# Altium PCB PCB-NW0101 Rev.B.PcbDoc (part 3 of 3)
Units mil, origin at the board's own origin, x right, y up, seen from the top; angles counter-clockwise.
Board outline 787.4 x 1377.95 mil, 6 copper layers (Top, GND, Inner3, Inner4, PWR, Bottom), stack 29.136 mil thick; 118 components, 126 nets, 559 pads, 474 vias.
Unrouted connection lines stored in the file: 214.
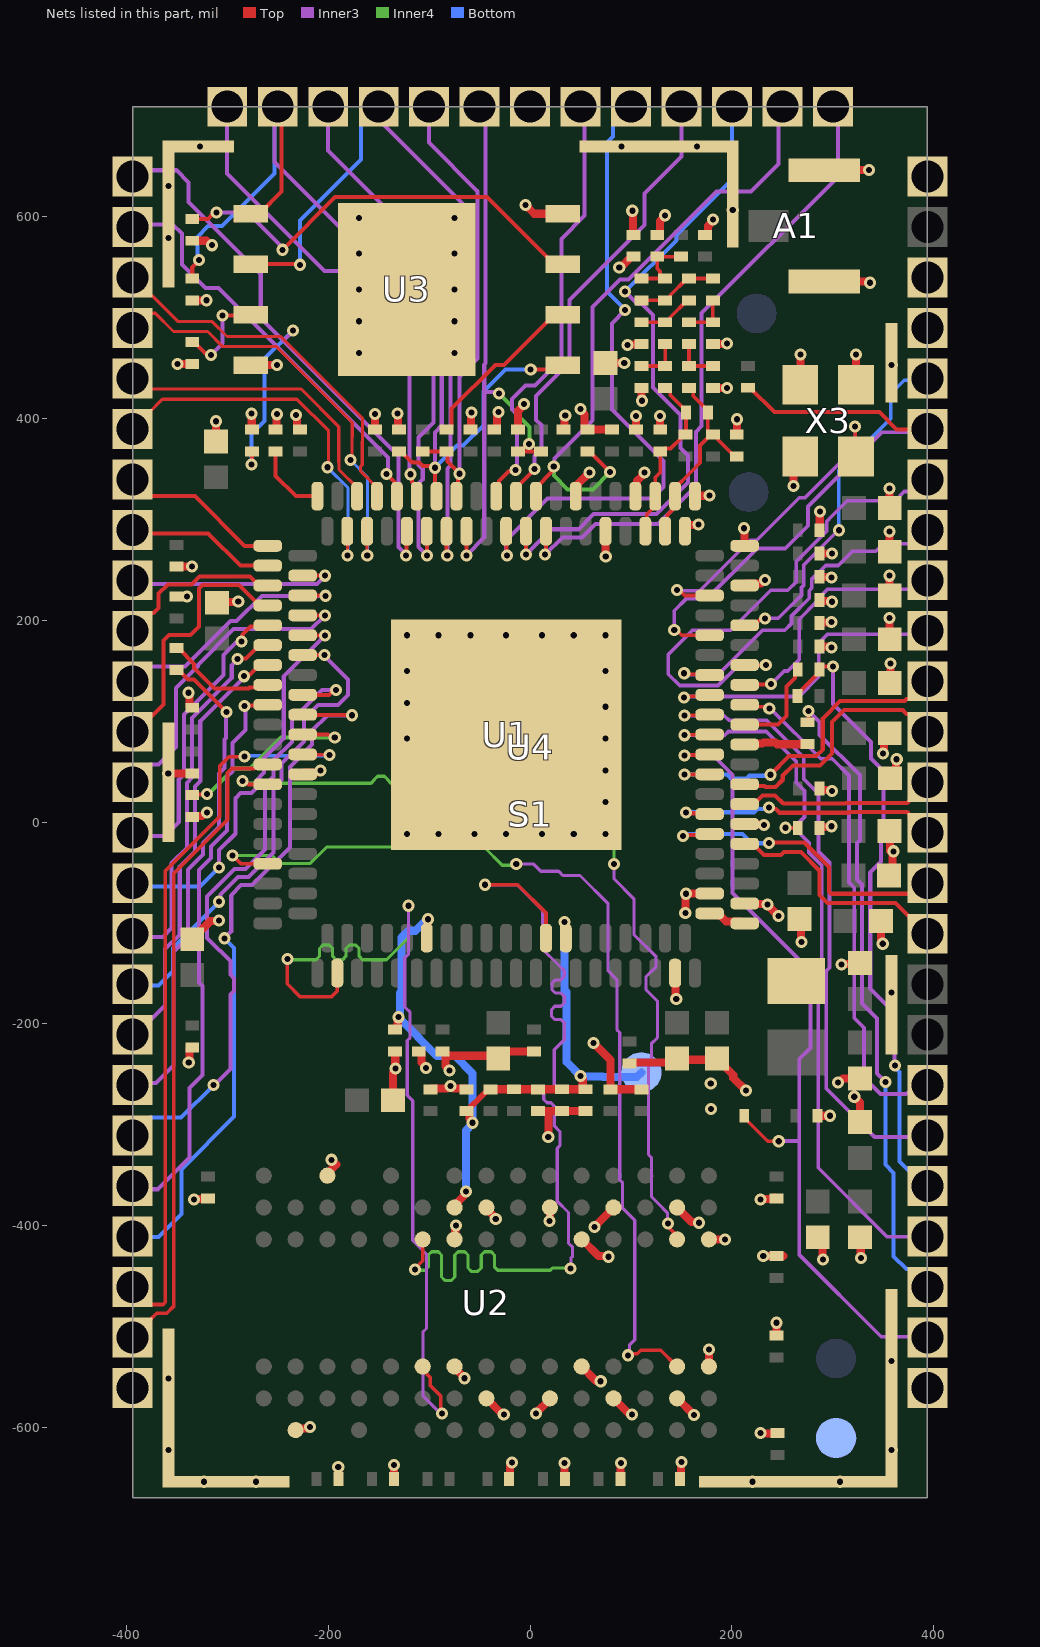
[diagram p7: the nets of this part, all layers, seen from the top]

## Via types
v1: diameter 12/12/12/12 (per signal layer), hole 6, Top to Bottom, tented both sides, 474 vias

## Nets (pads, with @x,y where several pads share a name; then routed paths per layer and width w, separated by ;. In a path a pad name is that pad's centre, name@x,y a point inside that pad or via, vN(x,y) a via of type N, cw(c..) or ccw(c..) an arc to the next point about the centre after c; other vN are vias at no path point) (continued)
DDR_RAS: U1.81 U2.K7 | length 883.6
  Top w3.63: v1(-240.4,-135.79) -240.6,-135.99 -240.6,-160.31 -227.68,-173.23 -196.85,-173.23 -190.95,-167.32 U1.81@-190.95,-149.6 ; U2.K7@-106.3,-539.37 -106.3,-542.72 -98.79,-550.22 -98.79,-558.21 -88.62,-568.38 -88.62,-584.3 v1(-87.09,-585.83)
  Inner3 w3.1: v1(-120.23,-82.96) -120.23,-130.52 -124.15,-134.43 -124.15,-183.19 -118.77,-188.57 -118.77,-213.56 -121.65,-216.45 -121.65,-270.77 -116.22,-276.2 -116.22,-414.59 -102.59,-428.23 -102.59,-501.68 -106.12,-505.21 -106.12,-568.5 -88.79,-585.83 v1(-87.09,-585.83)
  Inner4 w3.09: v1(-240.4,-135.79) -239.78,-136.4 -213.42,-136.4 -211.88,-136.4 -208.6,-133.13 -208.6,-125.26 -205.33,-121.99 -198.79,-121.99 -195.52,-125.26 -195.52,-133.13 -192.25,-136.4 -185.7,-136.4 -182.43,-133.13 -182.43,-125.26 -179.16,-121.99 -172.62,-121.99 -169.34,-125.26 -169.34,-133.13 -166.07,-136.4 -144.52,-136.4 -142.2,-136.4 -120.23,-114.43 v1(-120.23,-82.96)
DDR_UDM: U1.64 U2.B3 | length 892.1
  Top w3.63: v1(-284.8,40.77) -282.53,40.77 -278.97,37.21 -260.03,37.21 U1.64@-259.84,37.4 ; v1(136.52,-397.56) 138.12,-399.16 138.12,-402.49 145.67,-410.04 U2.B3@145.67,-413.39
  Inner3 w3.1: v1@83.15,-41.6 83.15,-56.27 102.8,-75.92 102.8,-111.39 124.9,-133.49 124.9,-143.26 114.9,-153.26 114.9,-166.28 126.2,-177.57 126.2,-213.61 120.15,-219.66 120.15,-235.6 117.3,-238.45 117.3,-329.49 120.15,-332.34 120.15,-370.97 126.69,-377.52 136.09,-386.91 136.09,-397.13 v1(136.52,-397.56)
  Inner4 w3.09: v1(-284.8,40.77) -283.09,39.07 -279.17,39.07 -278.53,38.43 -159,38.43 -157.46,38.43 -154.18,41.7 -154.18,42.07 -150.91,45.34 -144.37,45.34 -141.1,42.07 -141.1,41.7 -137.83,38.43 -131.28,38.43 -128.01,41.7 -128.01,42.07 -124.74,45.34 -118.2,45.34 -114.93,42.07 -114.93,41.7 -111.65,38.43 -105.11,38.43 -101.84,41.7 -101.84,42.07 -98.57,45.34 -92.02,45.34 -88.75,42.07 -88.75,41.7 -85.48,38.43 -78.94,38.43 -75.67,41.7 -75.67,42.07 -72.39,45.34 -65.85,45.34 -62.58,42.07 -62.58,41.7 -59.31,38.43 -43,38.43 11.37,38.43 42.98,6.82 73.9,6.82 86.35,-5.62 86.35,-21.48 83.15,-24.68 v1(83.15,-41.54)
DDR_UDQS: U1.72 U2.B7 | length 963
  Top w3.63: v1(-294.61,-33.1) -286.37,-41.34 U1.72@-259.84,-41.34 ; v1(96.95,-528.27) 98.55,-526.67 106.29,-526.67 109.66,-523.3 129.6,-523.3 U2.B7@145.67,-539.37
  Inner3 w3.1: v1(-13.68,-41.5) 3.18,-41.5 10.46,-48.78 28.26,-48.78 32.53,-53.05 49.45,-53.05 77.31,-80.91 77.31,-147.35 86.04,-156.08 86.04,-205.63 88.89,-208.48 88.89,-354.6 91.74,-357.45 91.74,-382.73 96.71,-387.7 103.66,-394.66 103.66,-512.86 98.65,-517.87 98.65,-526.57 v1(96.95,-528.27)
  Inner4 w3.09: v1(-294.61,-33.1) -294.52,-33.2 -255.5,-33.2 -247.7,-41 -217.75,-41 -201.48,-24.73 -45.65,-24.73 -27.52,-42.86 -15.05,-42.86 v1(-13.68,-41.5)
DDR_VREF: C4.1 C5.1 C11.2 C12.1 C13.1 pad.6 R1.1 R2.2 U1.90 U1.104 U2.J2 | length 769.9
  Top w6: C4.1@-61.02,-286.42 -59.1,-284.5 -59.1,-282.58 -49.1,-272.58 -49.1,-272.53 -40.57,-264 C11.2@-38,-264
  Top w8: C12.1@-131.28,-205.1 -131.09,-204.9 -131.09,-194.12 v1(-130.32,-193.35) ; U1.90@-102.36,-114.96 -101.63,-114.23 -101.63,-97.03 v1(-100.9,-96.3) ; U2.J2@-74.8,-381.89 -74.8,-379.73 -64.35,-369.27 -64.35,-366.67 v1(-63.58,-365.91) ; C4.1@-61.02,-286.42 -60.1,-287.34 -60.1,-293.67 -56.96,-296.81 v1(-56.96,-297.89) ; C11.2@-39.37,-264.76 R1.1@-15.75,-264.76 R2.2@7.87,-264.76 C13.1@31.5,-264.76 52.23,-264.76 52.23,-254.9 50,-252.68 v1(50,-251.59) ; v1(34.31,-99.1) 34.87,-99.66 34.87,-114.4 U1.104@35.43,-114.96
  Bottom w8: v1(-100.9,-96.3) -101.99,-96.3 -113.41,-107.72 -120.59,-107.72 -127.34,-114.47 -127.34,-167.52 -128.93,-169.1 -128.93,-189.13 -129.56,-189.76 -129.56,-191.6 -129.06,-192.1 v1(-130.32,-193.35) -110.22,-213.45 -110.22,-213.93 -92.15,-232 -74,-232 -56.96,-249.04 v1(-56.96,-297.89) ; v1(-63.58,-365.91) -63.58,-305.6 v1@-56.88,-298.9 ; v1(34.31,-99.1) 34.31,-166.27 36.31,-168.28 36.31,-237.9 v1(50,-251.59) ; v1@51.85,-252.2 71.67,-252.2 72,-252.53 105.73,-252.53 pad.6@110.24,-248.03
DDR_WE: U1.102 U2.K3 | length 887.1
  Top w3.63: v1(-114.14,-443.18) -114.14,-442.48 -106.39,-434.73 -106.39,-414.39 U2.K3@-106,-414 ; v1(-44.58,-62.17) -12.28,-62.17 15.75,-90.2 U1.102@15.75,-114.96
  Inner3 w3.1: v1(-44.58,-62.17) -12.66,-62.17 12.22,-87.05 12.22,-125.76 28.14,-141.68 33.86,-147.4 33.86,-153.06 30.59,-156.33 25.06,-156.33 21.78,-159.61 21.78,-166.16 25.06,-169.43 30.59,-169.43 33.86,-172.71 33.86,-179.26 30.59,-182.53 24.5,-182.53 21.23,-185.81 21.23,-192.36 24.5,-195.63 30.59,-195.63 33.86,-198.91 33.86,-201.81 33.86,-215.6 24.03,-225.44 24.03,-247.14 24.03,-261.79 20.75,-265.07 16.87,-265.07 13.59,-268.34 13.59,-274.89 16.87,-278.17 20.75,-278.17 24.03,-281.44 24.03,-299.91 24.03,-300.98 29.59,-306.54 29.59,-320.6 26.91,-323.28 26.91,-375.57 38.1,-386.76 38.1,-417.27 42.13,-421.3 42.13,-430.13 40.58,-431.68 40.58,-442.01 v1(40.26,-442.33)
  Inner4 w3.09: v1(-114.14,-443.18) -113.32,-444 -105.55,-444 -104,-444 -100.73,-440.73 -100.73,-429 -97.46,-425.73 -90.92,-425.73 -87.65,-429 -87.65,-450.73 -84.37,-454 -77.83,-454 -74.56,-450.73 -74.56,-429 -71.29,-425.73 -64.75,-425.73 -61.47,-429 -61.47,-441.84 -58.2,-445.11 -51.66,-445.11 -48.39,-441.84 -48.39,-429 -45.12,-425.73 -38.57,-425.73 -35.3,-429 -35.3,-440.73 -32.03,-444 -17.72,-444 20,-444 22.12,-441.88 39.81,-441.88 v1(40.26,-442.33)
EPHY_VRT: R23.1 U1.39 | length 73.8
  Top w4: R23.1@-251.97,367.13 -251.97,342.97 -231.84,322.84 U1.39@-210.63,322.84
ETH_RN: U1.34 U4.B4 | length 413.8
  Top w3.12: U4.B4@-381,504 -371.31,504 -353.18,485.87 -319.4,485.87 -304.41,470.88 -251.19,470.88 -176.11,395.8 -176.11,381.25 -176.3,381.07 -176.3,360.18 v1(-177.9,358.58) ; U1.34@-161.42,288.19 -161.35,288.12 -161.35,263.91 v1(-161.29,263.85)
  Bottom w3.12: v1(-177.9,358.58) -161.14,341.82 -161.14,264 v1(-161.29,263.85)
ETH_RP: U1.33 U4.B3 | length 349.6
  Top w3.12: U4.B3@-379.17,524.83 -375.57,521.24 -374.24,521.24 -348.99,495.99 -315.21,495.99 -300.22,481 -247,481 -165.99,399.99 -165.99,377.06 -166.18,376.88 -166.18,353.95 -167.85,352.28 -167.85,347.38 -151.58,331.1 U1.33@-151.58,322.84
ETH_TN: U1.36 U4.B6 | length 354.4
  Top w3.12: U4.B6@-378,405.07 -364.2,418.86 -230.93,418.86 -199.57,387.51 -199.57,352.63 v1(-200.77,351.43) ; U1.36@-181.1,288.19 -180.89,287.98 -180.89,264.06 v1(-180.68,263.85)
  Bottom w3.12: v1(-200.77,351.43) -180.38,331.04 -180.38,264.15 v1(-180.68,263.85)
ETH_TP: U1.35 U4.B5 | length 284.6
  Top w3.12: U4.B5@-380.51,424.8 -376.33,428.98 -371.16,428.98 -226.74,428.98 -189.45,391.7 -189.45,356.46 -189.21,356.22 -189.21,349.05 -171.26,331.1 U1.35@-171.26,322.84
GND: A1.2 A1.3 C1.2 C2.2 C3.2 C4.2 C5.2 C6.2 C7.2 C8.2 C9.2 C10.2 C12.2 C13.2 C14.2 C15.2 C16.2 C17.2 C18.2 C19.2 C20.2 C21.2 C22.2 C23.2 C24.2 C25.2 C26.2 C27.2 C28.2 C29.2 C30.2 C31.2 C32.2 C33.2 C34.2 C35.2 C36.2 C37.2 C38.2 C39.2 C40.2 C41.2 C42.2 C43.2 C44.2 C45.2 C46.2 C47.2 C48.2 C49.2 C50.2 C51.1 C52.2 C54.2 C55.2 C58.2 C61.2 C62.2 C63.1 C64.2 C65.2 C66.2 C67.2 C68.2 C69.2 C70.2 C71.2 C72.2 C73.2 C74.2 C75.2 C76.2 C77.2 C78.2 C79.2 C80.2 L5.2 pad.2 R2.1 R8.1 R15.1 R17.1 R18.1 R19.1 R23.2 R24.2 S1.1 S1.2 S1.3 S1.4 S1.5 S1.6 S1.7 S1.8 S1.9 S1.10 S1.11 U1.1 U1.2 U1.7 U1.10 U1.13 U1.63 U1.115 U1.120 U1.121 U1.128 U1.152 U1.156 U1.157 U2.A3 U2.A7 U2.B2 U2.B8 U2.D2 U2.D8 U2.E3 U2.E7 U2.F2 U2.F8 U2.H2 U2.H8 U2.J3 U2.J7 U2.N1 U2.P9 U3.4 U3.9 U4.B25 U4.C1 U4.C3 U4.C4 U4.C25 X3.1 X3.2 X3.4 | length 2561.9
  Top w8: v1(-358.42,47.95) -358.42,47.65 -358.27,47.5 S1.2@-358.27,39.37 ; S1.2@-357.05,47.54 -356.36,48.23 C34.2@-334.65,48.23 ; C14.2@-350.39,223.43 v1(-339.81,223.37) ; C16.2@-350.39,252.95 v1(-335,253) ; v1(-338.22,128.03) -337.45,127.27 -337.45,114.11 -336.53,113.19 C23.2@-334.65,113.19 ; v1(-338.08,-238.08) -337.31,-237.31 -337.31,-224.35 -335.57,-224.35 C64.2@-334.65,-223.43 ; C1.2@-334.65,-116.14 -316.61,-98.11 -308.63,-98.11 v1(-308,-97.48) ; R24.2@-334.65,4.92 -333.73,5.84 -324.79,5.84 -321.08,9.55 v1(-320,9.55) ; v1(-333.07,-373.77) -332.71,-373.4 -319.26,-373.4 C9.2@-318.9,-373.03 ; C17.2@-311,377 v1@-311,396 ; C35.2@-310,217.2 -309.34,217.86 -289.72,217.86 v1(-289.06,218.52) ; U3.4@-276.55,452.56 v1(-250.55,452.56) ; v1(-275.83,404.48) -275.71,404.35 -275.71,388.9 R17.1@-275.59,388.78 ; R23.2@-251.97,388.78 -251.26,389.49 -251.26,403.29 v1(-250.56,403.99) ; U2.P9@-232.28,-602.36 -230.75,-600.83 -220.8,-600.83 -219.18,-599.22 v1(-218.1,-599.22) ; v1(-231.93,403.18) -231.93,402.1 -230.89,401.06 -230.89,389.7 -230.36,389.17 C80.2@-227.64,389.17 ; U1.63@-225.2,47.25 -223.38,49.07 -210.64,49.07 -208.81,50.9 v1(-207.73,50.9) ; U2.N1@-200.79,-350.39 -200.79,-348.23 -191.93,-339.37 ; C70.2@-189.98,-649.05 v1(-189.98,-638.89) ; v1(-153.43,404.35) -153.49,404.3 -153.49,389.01 C15.2@-153.26,388.78 ; C74.2@-135.83,-275.59 -135.83,-247.98 -133.2,-245.36 v1(-133.2,-244.27) ; C67.2@-134.85,-653.39 v1(-134.86,-637.12) ; C12.2@-133.53,-227.39 -133.53,-243.68 v1@-132.93,-244.27 ; v1(-131.47,404.55) -130.71,403.79 -130.71,389.57 R18.1@-129.92,388.78 ; C22.2@-110.24,-227.36 -108.27,-227.36 -107.35,-228.28 -107.35,-238.21 -103,-242.56 v1(-103,-243.64) ; C73.2@-98.42,-264.76 -97.5,-263.84 -82.11,-263.84 -79.9,-261.64 v1(-78.82,-261.64) ; C20.2@-86.61,-227.36 -84.65,-227.36 C20.2@-83.72,-228.28 ; v1(-79.9,-246) -79.9,-245.74 -83.72,-241.92 C20.2@-83.72,-228.28 ; v1@-77.74,-261.74 -75.64,-263.84 -63.91,-263.84 C4.2@-62.99,-264.76 ; U2.J7@-74.8,-539.37 -74.8,-540.65 -65,-550.46 v1(-65,-551) ; U2.J3@-74.8,-413.39 -74.09,-412.68 -74.09,-400.6 v1(-73.38,-399.89) ; C19.2@-59.05,388.78 -58.53,389.31 -58.53,405.05 v1(-58,405.57) ; U2.H8@-43.31,-570.87 -27.56,-586.62 -26.38,-586.62 v1(-26,-587) ; U2.H2@-43.31,-381.89 -43.31,-383.02 -34,-392.33 v1(-34,-393.41) ; C24.2@-35.43,388.78 -34.51,389.7 -32.54,389.7 -32.54,403.85 -31.13,405.26 v1(-31.13,406.34) ; C2.2@-31.5,-234.25 -34.18,-231.57 -80.44,-231.57 C20.2@-83.72,-228.28 ; C2.2@-31.5,-231.57 -27.29,-227.36 C77.2@3.94,-227.36 ; C69.2@-20.33,-653.21 -19.75,-652.62 -19.75,-637.29 -17.84,-635.38 v1(-17.84,-634.3) ; R19.1@-11.81,388.78 -11.81,389.7 -11.81,407.05 -6,412.86 v1(-6,413.94) ; v1(6,-586) 6,-585.46 19.68,-571.77 U2.F8@19.68,-570.87 ; R2.1@9.84,-286.42 18.2,-286.42 31.62,-286.42 56.59,-286.42 55.6,-287.4 C5.2@55.12,-287.4 ; v1(18.04,-312.12) 18.26,-311.9 18.26,-286.42 ; v1(19.45,-395.39) 19.57,-395.27 19.57,-382.01 U2.F2@19.68,-381.89 ; C43.2@33.31,388.83 34.08,389.6 34.08,401.9 v1(34.85,402.67) ; v1(34,-635) 34.22,-635.22 34.22,-652.77 C68.2@34.72,-653.27 ; U1.13@45.28,322.84 47.1,324.66 47.1,334.58 v1(58.87,346.35) ; v1(50.08,409.03) 50.85,408.26 50.85,407.18 54.11,403.91 54.11,389.75 55.03,388.83 R15.1@56.7,388.83 ; U2.E7@51.18,-539.37 65.43,-553.62 69.62,-553.62 v1(70,-554) ; U2.E3@51.18,-413.39 67.68,-429.89 76.82,-429.89 v1(77.59,-430.65) ; R15.1@55.3,388.83 C46.2@81,388.83 ; v1(62.8,-218.81) 63.03,-218.81 79.81,-235.59 C65.2@79.81,-264.76 C72.2@110.24,-264.76 ; v1(63.86,-401.31) 63.86,-401.01 82.68,-382.19 U2.D2@82.68,-381.89 ; U1.10@74.8,288.19 74.9,288.09 74.9,263.1 v1(75,263) ; C42.2@74.8,454.72 74.84,454.76 v1(93.35,454.79) ; U2.D8@82.68,-570.87 98.43,-586.62 100.62,-586.62 v1(101,-587) ; v1(88.36,549.33) 89.12,550.1 90.45,550.1 100.39,560.04 C75.2@102.36,560.04 ; C8.2@89.78,-653.33 89.78,-635.22 v1(90,-635) ; v1(96.56,472.44) 96.56,473.21 110.02,473.21 L5.2@110.24,473.43 ; C78.2@98.42,-239.17 99.35,-238.25 141.67,-238.25 C3.2@145.67,-234.25 ; U1.7@104.33,322.84 106.15,324.66 106.15,338.08 113.23,345.16 v1(113.23,346.05) ; v1(104.77,402.12) 104.88,402 104.88,388.94 C47.2@105,388.83 ; C55.2@110.24,430.12 110.61,429.75 110.61,417.68 v1(110.98,417.31) ; C61.2@125.98,581.69 127.95,581.69 128.87,582.61 128.87,595.25 133.56,599.94 v1(133.56,601.02) ; v1(128.77,402.17) 128.88,402.06 128.88,388.94 C51.1@129,388.83 ; U1.115@143.7,-149.6 144.27,-150.18 144.27,-174.67 v1(144.85,-175.24) ; U2.B8@145.67,-570.87 145.8,-570.87 162.28,-587.35 v1(162.4,-587.35) ; U2.B2@147,-383 147,-383.22 160,-396.22 166.6,-396.22 v1(167.37,-396.99) ; C7.2@148.81,-653.35 149.54,-652.62 149.54,-635 150,-634.54 v1(150,-634) ; C3.2@148.94,-230.98 153.48,-235.52 186.3,-235.52 201.34,-250.55 201.34,-253.45 213.82,-265.94 v1(213.82,-266.02) ; U1.2@153.54,288.19 153.54,292.34 155.44,294.23 166.58,294.23 v1(166.97,294.62) ; v1(153.78,-90.29) 154.1,-89.96 154.1,-71.41 v1(154.43,-71.09) ; v1@155.23,-71.89 156.15,-70.98 177.84,-70.98 U1.121@177.95,-70.86 ; U1.1@163.39,322.84 163.73,323.18 177.29,323.18 v1(177.63,323.52) ; C62.2@173.23,581.69 175.2,581.69 176.12,582.61 176.12,590.53 181.24,595.65 v1(181.24,596.73) ; U2.A7@177.16,-539.37 v1(177.16,-522.37) ; U2.A3@177.16,-413.39 177.26,-413.48 193.09,-413.48 v1(193.18,-413.57) ; C54.2@181.1,430.12 181.16,430.06 194.94,430.06 v1(195,430) ; C58.2@181.1,473.43 181.39,473.71 194.71,473.71 v1(195,474) ; C52.2@201.83,384.75 204.86,384.75 204.86,398.86 v1(205,399) ; v1(212,291) 212.3,290.7 212.3,273.92 U1.156@212.6,273.62 ; U1.120@212.6,-80.71 213.16,-81.27 234.68,-81.27 v1(235.24,-81.83) ; U1.128@212.6,-1.97 213.14,-2.51 231.17,-2.51 v1(231.72,-3.06) ; U1.152@212.6,234.25 214.42,236.08 228.75,236.08 232.53,239.85 v1(232.59,239.85) ; v1(228.35,-605.32) 228.73,-605.7 244.48,-605.7 C10.2@245.08,-606.3 ; v1(228.35,-374.02) 228.73,-373.63 241.2,-373.63 241.95,-372.88 C6.2@241.95,-372.11 ; v1(231,-430) 231.06,-430.06 245.08,-430.06 251.02,-430.06 251.07,-430.12 ; v1@235.29,-82.53 235.72,-82.53 246.19,-93.01 v1(246.19,-93.23) ; C71.2@244.09,-508.86 v1(244.09,-496.06) ; v1(261.13,333.01) 261.13,349.11 X3.2@269,356.98 ; C26.2@262.19,-95.38 268.3,-101.49 268.3,-118.21 v1(269.06,-118.98) ; X3.1@268,437.29 v1(268,463) ; C50.2@284.83,-291 v1(297.2,-291) ; C79.2@285,-411.42 289.89,-416.31 289.89,-433.12 v1(290.27,-433.5) ; C39.2@286.41,264.77 287.64,266 v1(299.05,266) ; R8.1@286.83,-6 286.83,-5.87 287.75,-4.95 297.99,-4.95 v1(298.75,-4.18) ; C63.1@286.83,32.46 287.75,31.54 298.45,31.54 v1(299.21,30.78) ; C18.2@286.83,197 287.3,197.48 298.3,197.48 v1(298.78,197.95) ; C45.2@286.83,289 286.96,289.13 286.96,307.6 v1(287.08,307.73) ; C41.2@287.05,218.89 287.11,218.96 298.29,218.96 v1(299.05,218.19) ; C37.2@287.25,243.12 287.69,242.68 298.46,242.68 v1(298.78,242.37) ; C21.2@291.23,174 296.42,174 297.44,172.98 v1(298.53,172.98) ; A1.2@291.34,535.43 291.4,535.37 334.89,535.37 336.04,534.21 v1(336.58,534.21) ; A1.3@291.34,645.67 291.37,645.71 v1(335.93,645.74) v1(335.93,645.74) ; v1(305.24,-257.88) 306.32,-257.88 310.05,-254.16 322.82,-254.16 C30.2@322.99,-253.99 ; v1(308.41,-141) 308.79,-140.62 318.96,-140.62 C31.2@322.83,-136.74 ; v1(321.16,-272.16) 326.89,-277.89 326.89,-293.19 C49.2@322.83,-297.24 ; C48.2@322.83,-411.42 327.62,-416.2 327.62,-431.62 v1(328,-432) ; X3.4@323,437.17 v1(323,463) ; C25.2@347.72,-94.06 347.72,-118.33 349.42,-120.03 v1(349.42,-120.57) ; C27.2@348.3,-55.12 C27.2@348.65,-55.47 ; v1(349.69,67.96) 350.46,68.73 350.46,82.03 C29.2@356.43,88 ; v1(355.96,287.6) 356.13,287.43 C38.2@356.13,268.02 ; v1(356,244) 356.15,243.85 356.15,224.56 C36.2@356.3,224.41 C36.2@356.3,230 ; v1(356.21,202.2) 356.26,202.15 C40.2@356.3,181.1 C40.2@356.3,181.1 ; v1(356.21,330.3) 356.26,330.26 356.26,311.07 C44.2@356.3,311.02 ; C32.2@356.3,43.31 362.45,49.46 362.45,61.38 v1(363.21,62.15) ; C33.2@356.3,137.79 357,138.5 v1@357,156 ; C27.2@356.62,-53.38 359.12,-50.88 359.12,-29.77 v1(359.89,-29) ; v1@357,-29 356.62,-28.62 356.62,-12.38 C28.2@357.92,-11.08
  other v1: -322.83,-653.54 -271.65,-653.54 220.47,-653.54 307.09,-653.54 -358.27,-622.05 358.27,-622.05 -358.27,-551.18 358,-534 -196.75,-334.6 179.2,-284.26 179.03,-259.22 358,-169 -122.05,-11.81 -90.55,-11.81 -55.12,-11.81 -23.62,-11.81 11.81,-11.81 43.31,-11.81 74.8,-11.81 74.8,19.69 74.8,51.18 -122.05,82.68 74.8,82.68 74.8,114.17 -122.05,118.11 -122.05,149.61 74.8,149.61 357,157 -122.05,185.04 -90.55,185.04 -59.06,185.04 -23.62,185.04 11.81,185.04 43.31,185.04 74.8,185.04 -311,397 358.27,452.76 -169.29,464.57 -74.8,464.57 -169.29,496.06 -74.8,496.06 -169.29,527.56 -74.8,527.56 -169.29,562.99 -74.8,562.99 -358.27,578.74 -169.29,598.43 -74.8,598.43 200.79,606.3 -358.27,629.92 -326.77,669.29 90.55,669.29 165.35,669.29
I2C_SCL: U1.20 U4.A5 | length 613.5
  Top w4: U1.20@-23.62,288.19 -23.31,287.88 -23.31,264.31 v1(-23,264)
  Inner3 w4: v1(-23,264) -24,265 -24,279 17.32,320.32 120.59,320.32 132.38,332.11 132.38,357.53 81.09,408.83 81.09,494.05 94.06,507.03 v1(94.06,507.35)
  Bottom w4: U4.A5@82.31,690.98 82.31,679.24 76.36,673.28 76.36,525.39 94.06,507.68 v1(94.06,507.35)
I2C_SDA: U1.21 U4.A6 | length 417.5
  Top w4: U1.21@-33.46,322.84 -30.88,325.42 -30.88,337.67 -21.5,347.05 -15.79,347.05 v1(-14.26,348.58)
  Inner3 w4: v1(-14.26,348.58) -12.87,349.97 -12.87,403.84 -18,408.97 -18,418.91 -4.48,432.43 5.12,432.43 31,458.31 31,577.77 54,600.77 U4.A6@54,690.92
I2S_CLK: U1.19 U4.A4 | length 441.2
  Top w4: U1.19@-13.78,322.84 -13.78,332.09 -13.1,332.09 4.26,349.45 v1(4.26,349.76)
  Inner3 w4: v1(4.26,349.76) v1(4.26,349.76) 4.32,362.82 11.13,369.63 11.13,393.17 6,398.31 6,422 39,455 39,516.94 113.29,591.23 113.29,622.66 150,659.37 U4.A4@150,691.51
I2S_SDI: U1.16 U4.A1 | length 617.2
  Top w4: v1(15,265) 15.75,265.75 U1.16@15.75,288.19
  Inner3 w4: v1(15,265) 32,282 51.31,282 64.72,295.41 126.72,295.41 164.38,333.08 164.38,386.52 170,392.14 170,504.11 305,639.11 U4.A1@305,690.98
I2S_SDO: R15.2 U1.17 U4.A2 | length 601
  Top w4: U1.17@5.91,322.84 5.91,331.1 21.94,347.14 21.94,350.49 v1(23.47,352.02) ; R15.2@58.97,367.17 69.44,356.7 69.44,356.49 79.29,346.64 v1(79.29,346.55)
  Inner3 w4: v1(23.47,352.02) 24.28,352.83 24.28,360.19 62.08,397.99 62.08,510.35 89.08,537.35 97.55,537.35 184.68,624.48 218.82,624.48 246.32,651.97 U4.A2@246.32,692.88
  Inner4 w4: v1(23.47,352.02) v1(23.47,352.02) 23.52,343.1 37.08,329.55 62.29,329.55 v1(79.29,346.55)
I2S_WS: U1.18 U4.A3 | length 640.3
  Top w4: v1(-4,265) -3.94,265.06 U1.18@-3.94,288.19
  Inner3 w4: v1(-4,265) 21,290 48,290 63.09,305.09 125.08,305.09 156.38,336.39 156.38,363.31 149.05,370.64 149.05,403.38 122,430.43 122,502.11 111.15,512.97 106.44,512.97 v1(94.06,525.35)
  Bottom w4: v1(94.06,525.35) 145,576.3 145,581.56 200,636.56 U4.A3@200,691.11
IO11: U1.29 U4.A13 | length 477.2
  Top w4: v1(-118.3,344.49) -116.76,342.96 -116.76,336.82 -112.2,332.26 U1.29@-112.2,322.84
  Inner3 w4: U4.A13@-300,690.61 -300,642.33 -203.53,545.86 -149.49,545.86 -119.47,515.85 -119.47,345.67 v1(-118.3,344.49)
IO14: U1.40 U4.B7 | length 136.6
  Top w4: U4.B7@-376.01,322.83 -331.83,322.83 -282.62,273.62 U1.40@-259.84,273.62
IO15: U1.42 U4.B8 | length 129.7
  Top w4: U4.B8@-376.13,285.53 -376.13,285.67 -376.01,285.79 -318.79,285.79 -286.94,253.94 U1.42@-259.84,253.94
IO16: U1.43 U4.B9 | length 198.3
  Top w4: U1.43@-225.2,244.1 -203.1,244.1 v1(-203,244)
  Inner3 w4: U4.B9@-375.74,236 -211,236 v1(-203,244)
IO17: U1.44 U4.B10 | length 151.5
  Top w4: U4.B10@-382,201.07 -376.01,207.05 -372.95,207.05 -372,208 -371.92,208 -367.89,212.03 -367.89,226.22 -358.74,235.37 -335.25,235.37 -327.61,243.01 -277.23,243.01 -268.47,234.25 U1.44@-259.84,234.25
IO38: R8.2 U1.137 U4.C22 | length 710.3
  Top w3.63: v1(153,86) 153.31,86.31 177.64,86.31 U1.137@177.95,86.62 ; v1(253.02,-5.68) 264.85,-5.68 R8.2@265.17,-6
  Inner3 w3.63: v1(153,86) 192.78,86 196.51,89.73 234.02,89.73 263.55,60.2 263.55,39.43 271.91,31.08 271.91,4.9 261.33,-5.68 ; v1(253.02,-5.68) 261.33,-5.68 ; 373.86,-410.76 353.64,-410.76 285.39,-342.5 285.39,-144.81 288.96,-141.24 288.96,-43.15 276.3,-30.49 276.3,-20.65 261.33,-5.68
IO44: U1.144 U4.C7 | length 476
  Top w3.63: U1.144@212.6,155.51 212.67,155.44 v1(233.53,155.37) v1(233.53,155.37)
  Inner3 w3.63: v1(233.53,155.37) 206.46,155.37 186.28,135.18 148.2,135.18 137,146.38 137,166 161,190 198.88,190 238.5,229.62 255.39,229.62 263.64,237.87 263.64,258.09 294.07,288.52 294.07,298.01 298.9,302.84 298.9,302.9 314.35,318.35 361.66,318.35 370.69,327.39 U4.C7@378.57,327.39
JTAG_TCK: U1.140 U4.C19 | length 487.9
  Top w3.63: U1.140@212.6,116.14 214.59,114.15 235.4,114.15 v1(237,112.55)
  Inner3 w3.63: v1(237,112.55) 238,112.55 287.94,62.61 299.37,62.61 315.89,46.08 315.89,-59.93 321.18,-65.22 321.18,-194.1 330.81,-203.73 330.81,-253.11 347.11,-269.41 372.62,-269.41 373.82,-268.21
JTAG_TDI: U1.142 U4.C9 | length 235.4
  Top w3.63: U1.142@212.6,135.83 212.98,136.21 238.4,136.21 v1(238.78,136.59)
  Inner3 w3.63: v1(238.78,136.59) 251.76,149.58 255.19,149.58 266.57,160.96 266.57,200.89 284.1,218.41 284.1,220.01 294.64,230.55 379.55,230.55 U4.C9@383,234
JTAG_TDO: U1.143 U4.C8 | length 319.3
  Top w3.63: v1(152.72,147.37) 153.57,146.52 177.1,146.52 U1.143@177.95,145.67
  Inner3 w3.63: v1(152.72,147.37) 154.09,146 186.3,146 230.23,189.94 252.27,189.94 258.94,196.61 258.94,204.05 276.47,221.57 276.47,229.1 278.91,231.54 278.91,240.21 292.88,254.18 305.28,254.18 319.45,268.35 342.52,268.35 349.95,275.78 376.18,275.78 U4.C8@377.39,277
JTAG_TMS: U1.141 U4.C10 | length 296.5
  Top w3.63: v1(152.48,123.37) 153.79,124.68 176.64,124.68 U1.141@177.95,125.99
  Inner3 w3.63: v1(152.48,123.37) 153.48,124.37 266.37,124.37 286,144 286,177.3 294.7,186 U4.C10@377,186
JTAG_TRST: U1.139 U4.C20 | length 602.5
  Top w3.63: v1(153.02,105.37) 153.48,105.84 177.49,105.84 U1.139@177.95,106.3
  Inner3 w3.63: v1(153.02,105.37) 192.45,105.37 197.1,100.73 234.27,100.73 271.18,63.82 271.18,42.6 285.74,28.04 285.74,-29.14 296.59,-39.99 296.59,-144.4 293.42,-147.57 293.42,-264.08 341.34,-312 U4.C20@375.67,-312
LXBK: L1.1 U1.118 U1.119 | length 37.4
  Top w8: U1.119@177.95,-90.55 186.29,-90.55 194.31,-98.57 208.57,-98.57 U1.118@211,-101
PCIE_CKN: U1.132 U4.C12 | length 226.3
  Top w4.09: U1.132@213.2,37.4 214.88,35.71 232.37,35.71 233.31,34.78 243.28,34.78 250.34,41.84 250.34,46.01 260.45,56.12 287.16,56.12 299.09,68.05 299.09,98.94 311,110.85 369.17,110.85 373.01,107.01 376.06,107.01 379.96,103.11 U4.C12@379.96,99.96
PCIE_CKP: U1.133 U4.C11 | length 300.4
  Top w4.09: v1(153,47) 153.12,47.12 177.83,47.12 U1.133@177.95,47.25 ; v1(238.29,46.83) 256.68,65.21 283.4,65.21 290,71.81 290,102.71 307.23,119.94 371.22,119.94 373.01,121.73 U4.C11@376.06,121.73
  Bottom w4.08: v1(153,47) 195,47 198.88,43.12 214.58,43.12 217.27,45.81 237.28,45.81 v1(238.29,46.83)
PCIE_RXN: U1.130 U4.C13 | length 178.5
  Top w4.09: U1.130@212.6,17.72 221.78,17.72 230.36,26.29 242.8,26.29 250.84,18.25 312.01,18.25 312.68,18.91 373.66,18.91 376.06,21.31 376.06,21.73 378.42,24.09 U4.C13@381.57,24.09
PCIE_RXP: U1.129 U4.C14 | length 254.6
  Top w4.09: v1(154.51,9.51) 155.32,8.69 177.14,8.69 U1.129@177.95,7.88 ; v1(236.67,14.25) 238.18,12.74 243.5,12.74 247.08,9.16 315.78,9.16 316.45,9.82 373.66,9.82 376.06,7.43 U4.C14@376.06,3.86
  Bottom w4.08: v1(154.51,9.51) 154.65,9.65 221.98,9.65 225.07,12.74 235.15,12.74 v1(236.67,14.25)
PCIE_TXN: U1.126 U4.C16 | length 212.1
  Top w4.09: U1.126@212.6,-21.65 220.76,-21.65 231.78,-32.67 248.55,-32.67 251.53,-29.69 268.3,-29.69 286.91,-48.3 286.91,-72.42 294.63,-80.14 362.03,-80.14 376.06,-94.17 U4.C16@376.06,-96.14
PCIE_TXP: U1.127 U4.C15 | length 295.6
  Top w4.09: v1(151.61,-13.83) 152.62,-12.82 176.94,-12.82 U1.127@177.95,-11.81 ; v1(236.77,-20.63) 237.22,-20.18 271.64,-20.18 296,-44.54 296,-68.66 298.4,-71.05 U4.C15@380,-71.05
  Bottom w4.08: v1(151.61,-13.83) 153.12,-12.31 155.78,-12.31 156.09,-12 210.36,-12 219.41,-21.05 236.35,-21.05 v1(236.77,-20.63)
PERST_N: R16.1 U1.135 U4.C24 | length 801.5
  Top w3.63: v1(153,66) 153.47,66.47 177.49,66.47 U1.135@177.95,66.93 ; R16.1@212.17,-291 212.17,-292.97 235.44,-316.23 v1(246.36,-316.23)
  Inner3 w3.63: v1(153,66) 181.46,66 200.57,46.89 200.57,-70.3 277.75,-147.49 277.75,-223.93 266.54,-235.14 266.54,-428.54 348,-510 U4.C24@375.94,-510 ; v1(246.36,-316.23) 246.59,-316 266,-316
PORST_N: R11.2 R13.1 U4.C21 | length 589.6
  Top w4: R13.1@265.06,126.97 R11.2@285.91,147.81 ; R11.2@287.75,153.89 287.86,154 v1(300,154)
  Top w8: R13.1@265.06,125 R13.1@265.06,126.97 ; R11.2@286.83,151 286.83,152.97 R11.2@287.75,153.89
  Inner3 w4: v1(300,154) 300,117.01 337.69,79.32 337.69,62.99 350.3,50.39 350.3,-1.46 347.89,-3.87 347.89,-38.93 337,-49.82 337,-165 361,-189 361,-240.59 v1(361.71,-241.29)
  Bottom w4: v1(361.71,-241.29) 361.71,-243.25 366.01,-247.56 366.01,-336.09 U4.C21@376.01,-346.09
PORST_N_1: R11.1 U1.138 | length 95.6
  Top w4: U1.138@212.6,96.46 245.46,96.46 254.14,105.14 254.14,134.37 262.25,142.49 262.25,148.08 R11.1@265.17,151
PWM0: U1.45 U4.B11 | length 225.4
  Top w4: U1.45@-225.2,224.41 -225.04,224.25 -202.69,224.25 v1(-202.53,224.09)
  Inner3 w4: U4.B11@-376.01,153.91 -342.01,153.91 -296.91,199 -290.74,199 -265.65,224.09 v1(-202.53,224.09)
PWM1: U1.46 U4.B12 | length 237.5
  Top w4: U4.B12@-375.74,104.18 -363.28,116.64 -363.28,172.71 -363.28,179.65 -357.86,185.07 -336.6,185.07 -327.81,193.86 -327.81,231.5 -324.3,235.01 -288.55,235.01 -268.11,214.57 U1.46@-259.84,214.57
REF_CLKO: R10.1 U4.C23 | length 611.1
  Top w4: R10.1@275,98.83 275.89,99.71 v1(275.89,110.04)
  Inner3 w4: v1(275.89,110.04) 286.64,99.29 286.64,86.4 326.65,46.38 326.65,-18.15 323.89,-20.91 323.89,-56.87 329,-61.98 329,-180 343.73,-194.73 343.73,-248.88 352,-257.15 v1(352,-257.59)
  Bottom w4: v1(352,-257.59) 352,-339.27 360.27,-347.54 360.27,-430.35 372.87,-442.95 U4.C23@376.95,-442.95
REF_CLKO_1: R10.2 U1.136 | length 63.7
  Top w8: U1.136@212.83,77 213.53,77.71 230.29,77.71 231.37,78.79 242.97,78.79 244.76,77 R10.2@275,77
RF_DIFF+: C56.1 C59.2 L5.1 | length 57.3
  Top w3.63: L5.1@110,494 111.08,495.08 C56.1@132,495.08 ; C56.1@132,497 137.75,497 138.93,498.18 138.93,500.15 155.51,516.73 C59.2@157.48,516.73
RF_DIFF-: C57.1 C58.1 L4.1 | length 45.7
  Top w3.63: C57.1@157.48,495.08 C58.1@181.1,495.08 C58.1@182,496 ; C58.1@181,496 181.1,496.1 L4.1@181.1,516.73
RF_HP+: C55.1 C56.2 L2.2 | length 45.9
  Top w3.63: C55.1@110,450 111.77,451.77 L2.2@133.86,451.77 133.86,472.86 C56.2@134,473
RF_HP-: C54.1 C57.2 L3.2 | length 47.3
  Top w3.63: C57.2@158,474 157.48,473.48 C57.2@157.48,473.43 L3.2@157.48,451.77 C54.1@181.1,451.77 181.23,451.77 C54.1@182,451
RF_LP: C60.1 C61.1 L6.2 L7.1 | length 74.1
  Top w3.63: C60.1@110,537 111.39,538.39 L6.2@133.86,538.39 131.89,538.39 128.79,541.49 128.79,545.43 125.98,548.23 C61.1@125.98,560.04 127.95,560.04 L7.1@149.61,560.04
RF_LP+: C51.2 C53.1 L2.1 R9.1 U1.5 U1.6 | length 164.9
  Top w3.63: U1.6@114.17,288.19 115.58,289.6 115.58,304.88 U1.5@124.02,313.32 ; U1.5@124.02,322.84 124.02,341.21 128.83,346.02 128.83,365.83 C51.2@130.02,367.02 ; C51.2@129.92,367.13 132.85,370.05 139.25,370.05 148.93,379.73 148.93,380.72 150.1,381.89 154.53,381.89 C53.1@154.53,405.51 ; L2.1@134,430 135.94,430 138.93,427.01 138.93,423.08 154.53,407.48 C53.1@154.53,405.51
RF_LP-: C52.1 C53.2 L3.1 R12.1 U1.3 U1.4 | length 208
  Top w3.63: U1.4@133.86,288.19 136.07,290.4 136.07,304.07 141.04,309.04 141.04,328.44 161.11,348.51 168.39,355.8 168.39,373.09 178.31,383 183.9,383 186.17,380.72 186.17,378.75 202.76,362.17 C52.1@204.72,362.17 ; L3.1@157.48,430.12 158.53,430.12 161.64,427.01 161.64,422.02 176.18,407.48 C53.2@176.18,405.73 ; C53.2@176,406 176,403.73 C53.2@177.36,402.36 ; R12.1@178.56,384.56 176.18,386.93 176.18,401.18 C53.2@179,404
RF_NOTCH: C59.1 C60.2 L4.2 L6.1 | length 83.7
  Top w3.63: C60.2@110,516 110.73,516.73 L6.1@133.86,516.73 ; L6.1@134,516 135.09,516 138.93,519.84 138.93,521.81 155.51,538.39 C59.1@157.48,538.39 L4.2@181.1,538.39 182.61,538.39 L4.2@183,538
RXD0: U1.31 U4.B2 | length 391.6
  Top w4: v1(-142.3,344.85) -134.48,337.03 -134.48,325.42 U1.31@-131.89,322.84
  Inner3 w4: U4.B2@-375.6,592 -354,592 -345,583 -345,552.44 -321.42,528.87 -308.54,528.87 -140.76,361.09 -140.76,346.38 v1(-142.3,344.85)
RXD1: U1.148 U4.C5 | length 329.4
  Top w3.63: U1.148@212.6,194.88 222.12,194.88 227.39,200.15 231.09,200.15 v1(232.69,201.75)
  Inner3 w3.63: v1(232.69,201.75) 245.88,201.79 268.83,224.74 268.83,232.26 271.27,234.7 271.27,254.93 305.35,289.01 v1(305.89,289.01)
  Bottom w3.63: v1(305.89,289.01) 305.89,348.41 357.24,399.76 357.24,424.24 370.69,437.69 U4.C5@376.07,437.69
RXD2: U1.48 U4.B14 | length 276.7
  Top w4: v1(-285.96,178.96) -284.85,180.07 -284.85,185.76 -276.86,193.75 -260.97,193.75 U1.48@-259.84,194.88
  Inner3 w4: U4.B14@-375.74,-14 -362,-14 -348,0 -348,41.99 -342.7,47.29 -342.7,106.58 -303.51,145.76 -303.51,165.63 -291.72,177.43 -287.49,177.43 v1(-285.96,178.96)
SD_CD: U1.50 U4.B16 | length 353.6
  Top w4: v1(-289.91,161.4) -289.21,162.09 -281.21,162.09 -268.11,175.2 U1.50@-259.84,175.2
  Inner3 w4: U4.B16@-375.87,-113.78 -363.78,-113.78 -355,-105 -355,-40.66 -340,-25.66 -340,38.68 -334.7,43.98 -334.7,103.26 -295.51,142.45 -295.51,155.05 -289.91,160.66 v1(-289.91,161.4)
SD_CLK: R22.1 U4.B19 | length 466.6
  Top w4: R22.1@-348.43,150.59 -338.94,141.11 -332.79,141.11 -300.81,109.13 v1(-300.81,108.87)
  Inner3 w4: U4.B19@-375.87,-258.36 -370.36,-258.36 -353,-241 -353,-128.7 -339,-114.7 -339,-47.29 -324,-32.29 -324,-21 -308,-5 -308,48.25 -302.7,53.55 -302.7,81.55 -301.06,83.18 -301.06,108.62 v1(-300.81,108.87)
SD_CLK_1: R22.2 U1.54 | length 108.3
  Top w4: R22.2@-348,171.82 -332.77,156.59 -332.77,152.59 -327.51,147.33 -327.51,147.15 -312.81,132.45 -278.54,132.45 -277.75,133.24 -262.43,133.24 U1.54@-259.84,135.83
SD_CMD: U1.55 U4.B20 | length 589.6
  Top w4: U1.55@-225.2,125.99 -199.32,125.99 -194.56,130.75 v1(-192.4,130.75)
  Inner3 w4: v1(-313.62,-260.5) -312.5,-260.5 -296.55,-244.55 -296.55,-170.94 -293.2,-167.59 -293.2,-154.86 -296.86,-151.2 -296.86,-137.69 -307.37,-127.18 -307.62,-127.18 -320,-114.8 -320,-73.82 -292.79,-46.6 -282,-46.6 -262.47,-27.07 -262.47,36.66 -254,45.13 -254,61.29 -236,79.29 -236,100.87 -206.12,130.75 v1(-192.4,130.75)
  Bottom w4: U4.B20@-376.01,-292.95 -345.7,-292.95 -313.62,-260.86 v1(-313.62,-260.5)
SD_D0: U1.52 U4.B18 | length 407
  Top w4: v1(-283.51,144.45) -281.98,145.98 -277.64,145.98 -268.11,155.51 U1.52@-259.84,155.51
  Inner3 w4: U4.B18@-375.91,-195.99 -361.51,-181.59 -361.51,-125.89 -347,-111.39 -347,-43.98 -332,-28.98 -332,35.36 -326.7,40.66 -326.7,99.95 -283.51,143.14 v1(-283.51,144.45)
SD_D1: U1.51 U4.B17 | length 461.7
  Top w4: U1.51@-225.2,165.36 -225.15,165.31 v1(-203.68,165.26) v1(-203.68,165.26)
  Inner3 w4: v1(-308,-78.94) -306.47,-77.41 -306.47,-71.6 -289.47,-54.6 -278.69,-54.6 -254.28,-30.19 -254.28,33.54 -246,41.82 -246,57.97 -224,79.97 -224,101.56 -209.83,115.73 -190.44,115.73 -180.4,125.78 -180.4,141.25 -203.68,164.53 v1(-203.68,165.26)
  Bottom w4: U4.B17@-375.87,-162 -368.01,-162 -353.79,-147.77 -353.79,-124.85 -308,-79.06 v1(-308,-78.94)
SD_D2: U1.57 U4.B22 | length 680.9
  Top w4: U1.57@-225.2,106.3 -224.93,106.03 -176.76,106.03 v1(-176.48,105.75)
  Inner3 w4: v1(-302.65,-115.18) -296,-108.52 -296,-73.31 -295.93,-73.24 -295.93,-72.37 -286.16,-62.6 -275.38,-62.6 -238,-25.23 -238,54.66 -216,76.66 -216,90.43 -200.67,105.75 v1(-176.48,105.75)
  Bottom w4: U4.B22@-375.6,-411 -368.01,-411 -345.48,-388.47 -345.48,-344.2 -293.2,-291.91 -293.2,-124.63 v1(-302.65,-115.18)
SD_D3: U1.56 U4.B21 | length 548.4
  Top w4: v1(-283,115.11) -282.48,115.63 -260.36,115.63 U1.56@-259.84,116.14
  Inner3 w4: U4.B21@-375.21,-363.78 -368.78,-363.78 -337.43,-332.43 -337.43,-263.66 -324.47,-250.69 -324.47,-162.44 -328,-158.91 -328,-47.6 -316,-35.6 -316,-24.31 -300,-8.31 -300,44.94 -294.7,50.24 -294.7,78.23 -281.76,91.17 -281.76,113.88 v1(-283,115.11)
SD_WP: U1.49 U4.B15 | length 376.9
  Top w4: U1.49@-225.2,185.04 -225.06,184.9 -203.33,184.9 v1(-203.19,184.76)
  Inner3 w4: v1(-308.13,-44.98) -308,-44.85 -308,-27.63 -292,-11.63 -292,23.54 -286.79,28.75 -275.97,28.75 -271.6,33.12 -271.6,40.61 -263.35,48.86 -263.35,63.25 -244,82.6 -244,144 v1(-203.19,184.76) v1(-203.19,184.76)
  Bottom w4: U4.B15@-375.47,-64 -327.15,-64 v1(-308.13,-44.98)
SPI_CLK: R4.1 R21.2 U1.25 U4.A9 | length 448.1
  Top w4: R21.2@-107,367 -106.87,367.13 R4.1@-82.68,367.13 ; R4.1@-81.94,365.64 -81.94,356.94 v1(-70,345) -71.42,343.58 -71.42,324.25 U1.25@-72.83,322.84 U1.25@-73.68,323.68
  Inner3 w4: U4.A9@-100,691.14 -100,672.92 -51.91,624.83 -51.91,459.01 -70,440.92 v1(-70,345)
SPI_CLK_1: R4.2 U3.6 | length 169.6
  Top w4: R4.2@-80.71,388.78 -77.79,391.7 -77.79,409.4 -34.46,452.73 -25.88,452.73 22.39,501 U3.6@32,501
SPI_CS0: R5.1 U1.28 U3.1 U4.A12 | length 870.3
  Top w4: R5.1@-329.76,541.31 -332.68,538.39 -332.68,539.34 -334.65,541.31 -334.65,549.31 -328.1,555.85 v1(-328.1,556.56) ; U3.1@-291.55,596.06 -286.61,601 U3.1@-280,601 ; U3.1@-268.05,602.56 -246,624.61 U4.A12@-246,691.78 ; U1.28@-102.36,288.19 -102.18,288.01 -102.18,264.18 v1(-102,264)
  Top w8: U3.1@-276.55,602.56 U3.1@-268.05,602.56
  Inner3 w4: U4.A12@-253,691.1 -253,653.87 -184.21,585.08 -153.5,585.08 -95.47,527.06 -95.47,395.97 -110.3,381.15 -110.3,353.86 -106.3,349.86 -106.3,346.54 -106.3,339.52 -110.67,335.15 -110.67,272.67 v1(-102,264)
  Bottom w4: v1(-328.1,556.56) -329.63,558.09 -329.63,579.43 -318.78,590.28 -305.17,590.28 -253,642.44 U4.A12@-253,692.36
SPI_CS1: R19.2 R20.2 U1.24 U4.A8 | length 580.2
  Top w4: v1(-63,264) U1.24@-62.99,288.19 ; R19.2@-11.81,367.13 R19.2@-9.84,367.13 ; v1(-0.87,374.6) -2.37,374.6 -9.82,367.15 R20.2@10.98,367.15
  Inner3 w4: v1(-63,264) -45.38,281.62 -45.38,425.86 ; U4.A8@-46.35,698.35 -43.91,695.91 -43.91,454.46 -45.38,452.99 -45.38,425.86 ; v1(-30.84,424.48) -32.22,425.86 -45.38,425.86
  Inner4 w4: v1(-30.84,424.48) -18,411.64 -18,408.97 -0.36,391.33 -0.36,375.11 v1(-0.87,374.6)
SPI_MISO: U1.26 U3.2 U4.A10 | length 707.1
  Top w4: U3.2@-276.55,552.56 -228.56,552.56 v1(-228,552) ; U1.26@-82.68,288.19 -82.68,264.68 v1(-82,264)
  Inner3 w4: U4.A10@-144,690.01 -59.91,605.93 -59.91,462.49 -79,443.4 -79,352.97 -82,349.97 v1(-82,264)
  Bottom w4: v1(-228,552) -228,595.92 -167.69,656.24 U4.A10@-167.69,690.89
SPI_MOSI: R18.2 U1.27 U3.5 U4.A11 | length 647.9
  Top w4: R18.2@-129.92,367.13 -127.95,367.13 -117.32,356.49 -115.96,356.49 -115.67,356.2 -109.76,356.2 -106.04,352.49 -95.88,352.49 v1(-94.35,350.95) -94.35,324.66 U1.27@-92.52,322.84 ; v1(0.66,448.08) 27.98,448.08 U3.5@32.45,452.56
  Inner3 w4: U4.A11@-200,689.86 -200,665 -87.47,552.47 -87.47,392.66 -94.35,385.78 v1(-94.35,350.95)
  Bottom w4: v1(-94.35,350.95) -72.55,372.75 -66.27,372.75 -46,393.02 -46,426.28 -24.2,448.08 v1(0.66,448.08)
SPIFLASH_NRESET: R7.1 U3.7 | length 434.9
  Top w4: R7.1@-333.72,596.72 -333,597.44 -319.2,597.44 -312.92,603.72 v1(-310.75,603.72) ; v1(-245.28,566.85) -193.07,619.06 -51.56,619.06 -51.5,619 -42.49,619 23.95,552.56 U3.7@32.45,552.56
  Inner3 w4: v1(-310.75,603.72) -279.82,603.72 -248.6,572.5 -248.6,572.34 -245.28,569.02 v1(-245.28,566.85)
SPIFLASH_NWP: R6.1 U3.3 | length 101.9
  Top w4: R6.1@-334.28,477 -321.64,464.36 -317.68,464.36 v1(-316.15,462.83) ; v1(-304.71,501.84) -284.16,501.84 -281,505 -278.99,505 U3.3@-276.55,502.56 ; U3.3@-284.61,503 U3.3@-281,503
  Inner3 w4: v1(-316.15,462.83) -304.71,474.26 v1(-304.71,501.84)
TXD0: R17.2 U1.30 U4.B1 | length 702.8
  Top w4: v1(-276,354) -275.59,354.41 R17.2@-275.59,367.13 ; v1(-123,264) -122.52,264.48 -122.52,287.71 U1.30@-122.05,288.19
  Inner3 w4: U4.B1@-375.74,645.67 -350.39,645.67 -338.38,633.65 -338.38,614.38 -266.79,542.79 -266.79,499.23 -244.28,476.72 -130.3,362.74 -130.3,272.56 -123,265.27 v1(-123,264) ; -244,477 -235,486 v1(-235,487)
  Bottom w4: v1(-276,354) -276,384.44 -263,397.44 -263,459 v1(-235,487)
TXD1: R14.1 U1.147 U4.C6 | length 549.9
  Top w3.63: v1(142.87,190.23) 145.13,190.23 150.32,185.04 U1.147@177.95,185.04
  Top w4: R14.1@216,430.17 217.97,430.17 242.14,406 346.18,406 363.18,389 U4.C6@375.01,389
  Inner3 w3.63: v1(142.87,190.23) 142.78,190.32 142.78,200.19 142.73,200.24 142.73,209.2 154.89,221.37 175.37,221.37 224.97,270.97 252.87,270.97 275.27,293.37 275.27,312.63 348.64,386 U4.C6@375.8,386
TXD2: U1.47 U4.B13 | length 290.8
  Top w4: U1.47@-225.2,204.73 v1@-203.2,204.74
  Inner3 w4: U4.B13@-376.01,57.05 -368.14,57.05 -350.7,74.5 -350.7,132.52 -328.9,154.32 -328.9,155.7 -293.6,191 -216.94,191 v1(-203.19,204.75)
USB_D+: U1.61 U4.B23 | length 708.9
  Top w3.6: U4.B23@-375.82,-477.93 -363.51,-477.93 -361.4,-475.82 -361.4,-48.54 -307.37,5.49 -307.37,55.44 -298,64.81 v1(-282.7,64.81)
  Top w3.61: U1.61@-225.2,66.93 -224.97,66.7 -198.93,66.7 v1(-198.7,66.47)
  Bottom w3.61: v1(-282.7,64.81) -281.87,65.64 -199.53,65.64 v1(-198.7,66.47)
USB_D-: U1.62 U4.B24 | length 622.1
  Top w3.6: U4.B24@-375.82,-492.75 -375.49,-492.42 -375.49,-492.11 -369.91,-486.53 -359.95,-486.53 -352.8,-479.39 -352.8,-50.69 -299.77,2.34 -299.77,48.68 -295.48,52.97 -273.49,52.97 -269.42,57.04 U1.62@-259.89,57.04
USB_VRT: R24.1 U1.59 | length 196.8
  Top w4: R24.1@-333.79,26.79 -333.5,27.08 -320.5,27.08 v1(-320,27.58) ; U1.59@-225.2,86.62 -200.1,86.62 -198.71,85.22 -194.99,85.22 v1(-193.46,83.69)
  Inner4 w4: v1(-320,27.58) -318.59,27.58 -293.4,52.77 -277.51,52.77 -246.59,83.69 v1(-193.46,83.69)
VDD_FLASH: C75.1 R5.2 R6.2 R7.2 U3.8 U4.A7 | length 105.9
  Top w8: v1(-349.32,453.81) R6.2@-333.45,453.81 ; R5.2@-334.65,516.73 -334.58,516.8 -320.6,516.8 v1(-320.54,516.87) ; R7.2@-332.68,575.79 -320.59,575.79 -316.19,571.39 v1(-315.11,571.39) ; v1(-4.61,611.29) 4.12,602.56 U3.8@23.95,602.56 ; v1(101.29,605.56) 101.83,605.02 101.83,582.23 C75.1@102.36,581.69
XTALIN: U1.151 X3.3 | length 325
  Top w3.63: v1(145.52,229.91) 147.78,229.91 153.28,224.41 U1.151@177.95,224.41 ; X3.3@322,358 v1(322,391.73)
  Inner3 w3.63: v1(145.52,229.91) 146.43,229 168,229 218.18,279.18 224.65,279.18 266.65,321.18 272.48,321.18 322,370.7 v1(322,391.73)
pads on no net: U1.9 U1.11 U1.12 U1.37 U2.A2 U2.A8 U2.E2 U2.E8 U2.R3 U2.R7

## Polygon pours and split planes (outlines as drawn)
GND on Top "GND_L01_P006" (solid, pour order 6): -393.7,716.54 393.7,716.54 393.7,-669.29 -393.7,-669.29
LXBK on Top "Top-LXBK" (solid, remove dead copper, pour order 5): 194,-92 194,-117.24 215,-117.24 215,-186.52 292.32,-186.52 292.32,-129.11 252,-129.11 252,-92
1V2 on Top "Top-1V2" (solid, remove dead copper, pour order 4): 194.88,-191.87 194.88,-261.88 287.36,-261.88 287.36,-236.11 358.13,-236.11 358.13,-157.25 296.26,-157.25 296.26,-191.87
GND on Bottom "GND_L06_P003" (solid, pour order 3): -393.7,716.54 393.7,716.54 393.7,-669.29 -393.7,-669.29
1V2 on Bottom "1V2_L06_P002" (solid, pour order 2): -323,132 -185,132 -185,248 -51.18,248 -51.18,374.02 -15.75,374.02 -15.75,248 143,248 143,173 267.72,173 267.72,93 161,93 161,57.33 304.55,57.33 304.55,11.81 153,11.81 153,-60 242,-60 242,-133.86 354.33,-133.86 354.33,-271.65 188.98,-271.65 188.98,-117 94.49,-117 -63,-117 -63,-177.17 -122.05,-177.17 -122.05,-117 -222,-117 -222,82.68 -323,82.68
1V8 on PWR (split plane): 194.9,-17 195.29,-18.95 196.4,-20.6 198.05,-21.71 200,-22.1 307.9,-22.1 307.9,-37.29 200,-37.29 198.05,-37.68 196.4,-38.78 195.29,-40.44 194.9,-42.39 194.9,-159 195.29,-160.95 196.4,-162.6 198.05,-163.71 200,-164.1 223.25,-164.1 223.25,-318.9 223.64,-320.85 224.74,-322.5 226.4,-323.61 228.35,-324 298.05,-324 298.05,-659.2 -383.61,-659.2 -383.61,51.9 194.9,51.9
3V3 on PWR (split plane): 383.61,-659.2 308.25,-659.2 308.25,-318.9 307.86,-316.95 306.75,-315.29 305.1,-314.19 303.15,-313.8 233.44,-313.8 233.44,-159 233.06,-157.05 231.95,-155.4 230.3,-154.29 228.35,-153.9 205.1,-153.9 205.1,-47.49 313,-47.49 314.95,-47.1 316.6,-45.99 317.71,-44.34 318.1,-42.39 318.1,-17 317.71,-15.05 316.6,-13.4 314.95,-12.29 313,-11.9 205.1,-11.9 205.1,57 204.71,58.95 203.6,60.6 201.95,61.71 200,62.1 -383.61,62.1 -383.61,426.61 107.13,426.61 109.08,427 110.74,428.1 111.84,429.75 112.23,431.71 112.23,698.58 383.61,698.58
VDD_FLASH on PWR (split plane): 102.03,436.8 -383.61,436.8 -383.61,698.58 102.03,698.58
GND on GND (split plane): 383.61,-659.2 -383.61,-659.2 -383.61,698.58 383.61,698.58

## Other copper
Bottom:
  rectangle net GND: -141.73,-31.5 94.49,204.72
PWR (plane layer: these items are gaps in the copper):
  lines w10: -394.05,704.91 -390.79,708.17 ; 254.18,-669.29 -393.7,-669.29 ; -393.7,-669.29 -393.7,57 200,57 200,-17 313,-17 313,-42.39 200,-42.39 200,-159 228.35,-159 228.35,-318.9 303.15,-318.9 303.15,-669.29 -393.7,-669.29 ; -393.7,431.71 -393.7,708.66 107.13,708.66 107.13,431.71 -393.7,431.71

## Silkscreen, mask and mechanical layers (free items; w line width, h text height)
Silkscreen Top:
  text "NW0101 Rev.B" at 295.8,-628.84 h20 r90
Solder Mask Bottom:
  region: 95,205 95,-34 93,-32 -142,-32 -142,205
Shield Drawing:
  lines w10: 200.79,669.29 200.79,494.09 358.27,494.09 358.27,-653.54 -358.27,-653.54 -358.27,669.29 201.07,669.29
Outline:
  lines w0.01: -393.7,-669.29 -393.7,708.66 393.7,708.66 393.7,-669.29 -393.7,-669.29
  lines w47.24: -393.7,-669.29 -393.7,708.66 393.7,708.66 393.7,-669.29 -393.7,-669.29
Drill Drawing:
  lines w1: -200.79,0 -200.76,0 ; 0,-295.28 0.03,-295.28 ; 23.62,122.05 23.65,122.05 ; 0,295.28 0.03,295.28 0,295.28 ; 200.79,0 200.81,0

## Dimensions
432.29,568.73 to 447.95,494.1 on Shield Drawing
368.93,415.41 to 365.06,-132 on Shield Drawing
-358.27,-580.71 to 358.27,-561.02 on Shield Drawing
358.27,454.72 to -358.27,602.36 on Shield Drawing
200.79,622.05 to 358.27,454.72 on Shield Drawing
49.32,678.2 to 200.79,622.05 on Shield Drawing
49.2,678.24 to -293.37,678.57 on Shield Drawing
-358.27,602.36 to -293.39,678.4 on Shield Drawing
-238.39,-632.29 to 167.02,-637.92 on Shield Drawing
167.5,-637.82 to 358.27,-561.02 on Shield Drawing
-358.27,-580.71 to -238.33,-632.18 on Shield Drawing
364.57,-131.99 to 366.65,-230.22 on Shield Drawing
-370.13,-19.6 to -364.49,-501.98 on Shield Drawing
-364.47,-502.02 to -301.18,-653.54 on Shield Drawing
127.95,669.29 to 247.47,568.79 on Shield Drawing
368.94,415.42 to -393.7,716.54 on Shield Drawing
365.56,-462.74 to 366.65,-230.29 on Shield Drawing
265.75,-653.54 to 365.5,-462.74 on Shield Drawing
-370.33,-19.78 to -368.35,98.5 on Shield Drawing
-369.53,529.59 to -368.19,98.44 on Shield Drawing
-328.74,669.29 to -367.35,529.63 on Shield Drawing
127.95,669.29 to 265.75,-653.54 on Shield Drawing
-328.74,669.29 to -301.18,-653.54 on Shield Drawing
-23.62,86.61 to -393.7,-669.29 on Drill Drawing
393.7,708.66 to 300,708.66 on Drill Drawing
-50,708.66 to 0,708.66 on Drill Drawing
-393.7,708.66 to -300,708.66 on Drill Drawing
-393.7,-310.63 to -393.7,-260.63 on Drill Drawing
-393.7,708.66 to -393.7,639.37 on Drill Drawing
-393.7,-669.29 to -393.7,-560.63 on Drill Drawing
-23.62,86.61 to -393.7,-669.29 on Drill Drawing
-393.7,708.66 to 393.7,708.66 on Drill Drawing
393.7,708.66 to 393.7,-669.29 on Drill Drawing